# Altium PCB ELEC-URB-CANACC-R2.0A2.PcbDoc
Units mil, origin at the board's own origin, x right, y up, seen from the top; angles counter-clockwise.
Board outline 3310 x 3308 mil, 2 copper layers (Top Layer, Bottom Layer); 19 components, 18 nets, 120 pads, 18 vias.
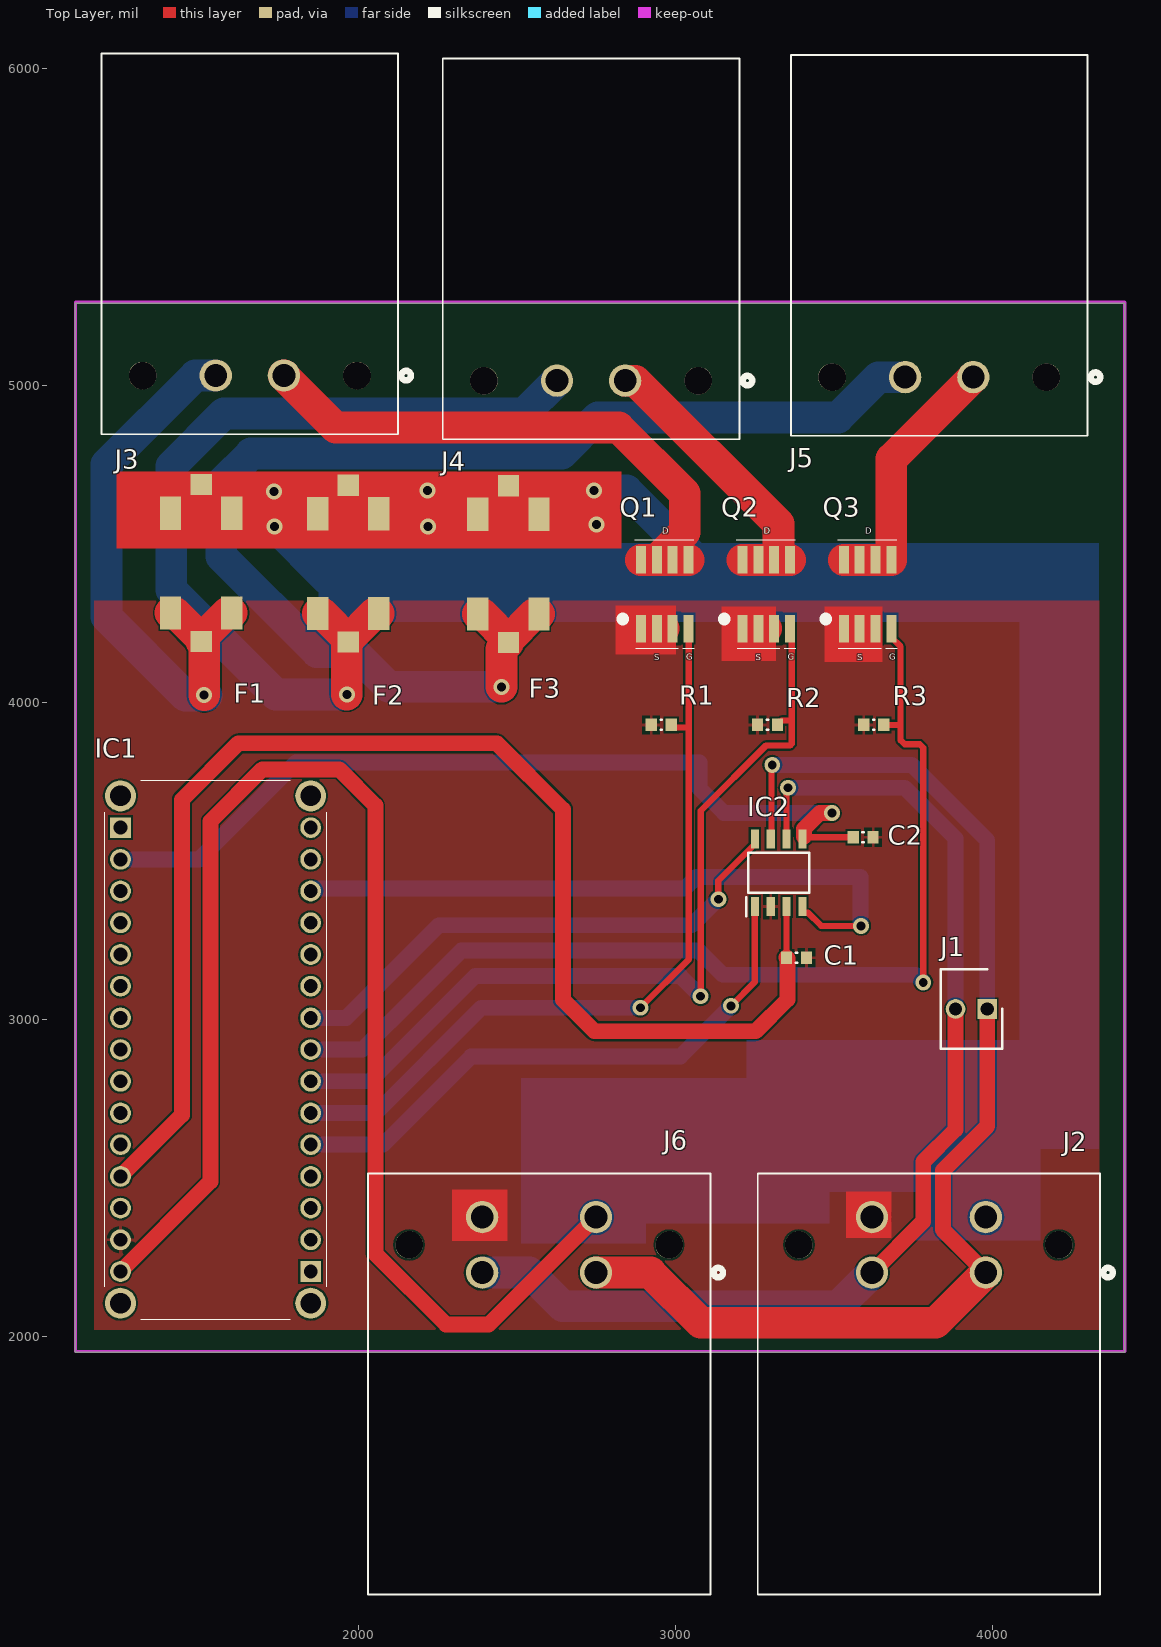
[diagram p0: Top Layer view]
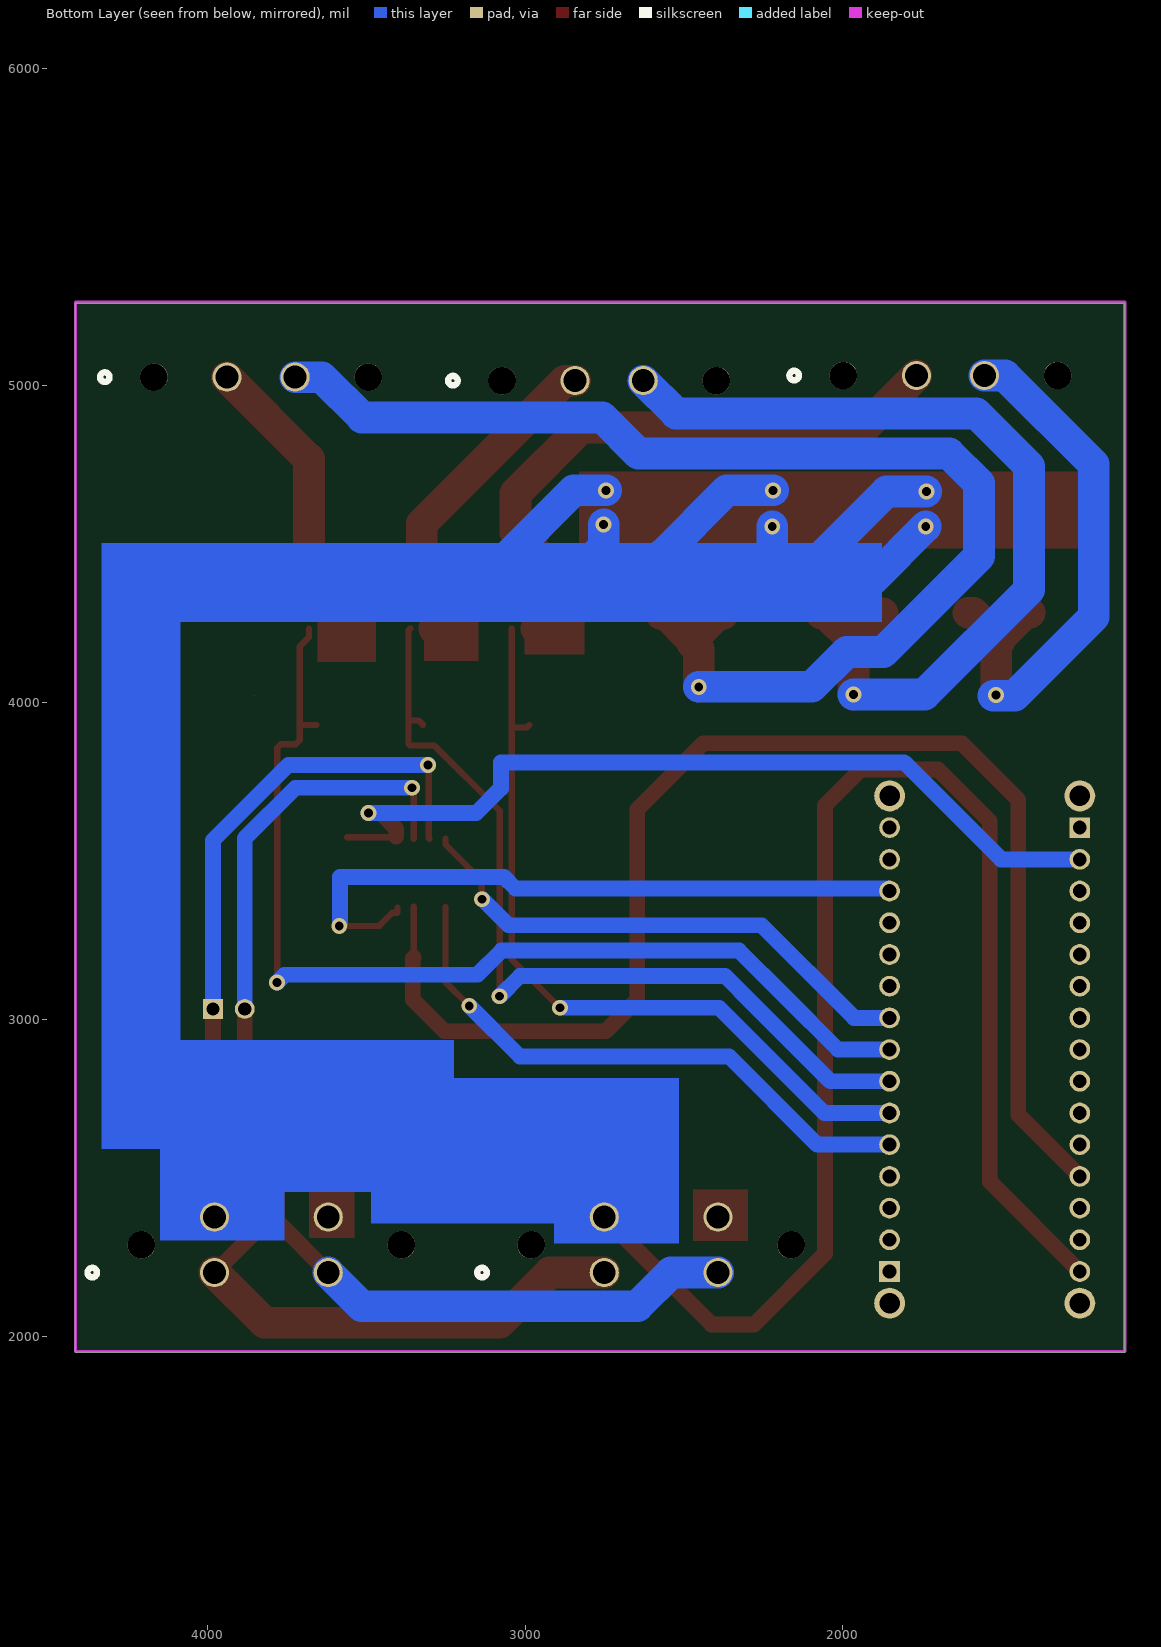
[diagram p1: Bottom Layer view, seen from below]

## Layer stack, top to bottom
Top Solder: solder mask 0.4, Solder Resist, Dk 3.5
Top Layer: signal copper 1.4
Dielectric 1: dielectric 12.6, FR-4, Dk 4.8
Bottom Layer: signal copper 1.4
Bottom Solder: solder mask 0.4, Solder Resist, Dk 3.5

## Board outline
1108,1950 4418,1950 4418,5258 1108,5258

## Design rules (kind name [scope] priority, off if disabled: settings)
BoardOutlineClearance [All] p1: gap=10 ignorepadtopadclearanceinfootprint=FALSE
Clearance [All] p1: gap=6 ignorepadtopadclearanceinfootprint=TRUE
HoleSize [All] p1: absolutevalues=TRUE maxlimit=250 minlimit=8 maxpercent=80.000 minpercent=20.000
MinimumAnnularRing [All] p1: minimumring=10
PlaneClearance [All] p1: clearance=15
PolygonConnect [All] p1: connectstyle=Relief reliefconductorwidth=10 reliefentries=4 polygonreliefangle="90 Angle" airgapwidth=10
RoutingVias [All] p1: holewidth=12 width=26 viastyle="Through Hole" minholewidth=8 minwidth=18 maxholewidth=28 maxwidth=50
SilkToSilkClearance [All] p1: silktosilkclearance=3
SilkToSolderMaskClearance [IsPad] p1: minsilkscreentomaskgap=3 clearancetoexposedcopper=TRUE
SolderMaskExpansion "Tented Via 2" [IsVia] p1: expansion=-200
SolderMaskExpansion "Tented Via" [IsVia] p2: expansion=-250
SolderMaskExpansion [All] p3: expansion=2
UnRoutedNet [All] p1: checkbadconnections=TRUE
Width [All] p1: maxlimit=100 minlimit=6 preferedwidth=10 minimp=50.000000 maximp=50.000000 favimp=50.000000
25 further rules are at their usual default settings.

## Components (designator, comment, footprint, x,y, rotation, side; value= is the part's Value field where it differs from the comment)
C1 "0.1uF" 0603C 3382.5,3194 r0 top value=1uF
C2 "0.1uF" 0603C 3592.5,3574 r180 top value=1uF
F1 "Small Fuse" "SML FUSE HOLDER" 1408,4596 r270 top
F2 "Small Fuse" "SML FUSE HOLDER" 2064.91,4279.43 r90 top
F3 "Small Fuse" "SML FUSE HOLDER" 2570,4278 r90 top
IC1 "NUCLEO L432KC" ABX00028 1250,3604 r270 top
IC2 "MCP2562FD-E_SN" SOIC127P600X175-8N 3326,3462 r90 top
J1 "0050291746" SHDR2W87P0X254_1X2_493X635X1044P 3984,3032 r180 top
J2 "DTF13-4P-G003" CONN4_DTF13-4P 3620.5,2375.49 r180 top value=Value
J3 "DTF13-2P" CONN2_DTF13-2P 1550.5,5030 r0 top value=Value
J4 "DTF13-2P" CONN2_DTF13-2P 2627,5014 r0 top value=Value
J5 "DTF13-2P" CONN2_DTF13-2P 3725,5025 r0 top value=Value
J6 "DTF13-4P-G003" CONN4_DTF13-4P 2391,2375.49 r180 top value=Value
Q1 "MOSFET-N" "DIODE MOSFET" 2892,4222.55 r0 top
Q2 "MOSFET-N" "DIODE MOSFET" 3211.77,4222.55 r0 top
Q3 "MOSFET-N" "DIODE MOSFET" 3531.54,4222.55 r0 top
R1 "10k" 0603R 2955.5,3928 r0 top
R2 "10k" 0603R 3290.75,3928 r0 top
R3 "10k" 0603R 3626,3928 r0 top

## Footprints (in the part's own frame and the unit in brackets; to place one, negate y for a bottom-side part, rotate by r counter-clockwise, add the part's x,y. Pads: shape width x height; smd on the part's side, far side on the other; paste and mask are expansions set on the pad)
0603C [mm] "Chip Capacitor, Body 1.6x0.8mm, Height 1.0mm, IPC Medium Density"
  rect 0.9x1 smd: 1(-0.8,0) 2(0.8,0)
  silkscreen extent -0.05,-0.4 0.05,0.4, body extent -0.87,-0.48 0.88,0.47, height 1
0603R [mm] "Chip Resistor, Body 1.6x0.8mm, IPC Medium Density"
  rect 0.9x1 smd: 1(-0.8,0) 2(0.8,0)
  silkscreen extent -0.05,-0.4 0.05,0.4, body extent -0.85,-0.47 0.85,0.47, height 0.6
ABX00028 [mm]
  rect 1.665x1.665 hole 1.11: A1(0,0) B1(35.56,15.24)
  round 1.665 hole 1.11: A2(2.54,0) A3(5.08,0) A4(7.62,0) A5(10.16,0) A6(12.7,0) A7(15.24,0) A8(17.78,0) A9(20.32,0) A10(22.86,0) A11(25.4,0) A12(27.94,0) A13(30.48,0) A14(33.02,0) A15(35.56,0) B2(33.02,15.24) B3(30.48,15.24) B4(27.94,15.24) B5(25.4,15.24) B6(22.86,15.24) B7(20.32,15.24) B8(17.78,15.24) B9(15.24,15.24) B10(12.7,15.24) B11(10.16,15.24) B12(7.62,15.24) B13(5.08,15.24) B14(2.54,15.24) B15(0,15.24)
  round 2.475 hole 1.65: MH1(-2.54,0) MH2(-2.54,15.24) MH3(38.1,15.24) MH4(38.1,0)
  silkscreen extent -3.81,-1.27 39.37,16.51, body extent -3.81,-1.27 39.37,16.51, height 10
CONN2_DTF13-2P [mil]
  round 102 / inner round 92 / far side round 92 hole 72 mask+0: 1(215,0) 2(0,0)
  round 87 hole 87: 3(-230.5,0) 4(445.5,0)
  silkscreen extent -360,-185 616,1016, body extent 0,0 10,10, height 10
CONN4_DTF13-4P [mil]
  round 102 / inner round 92 / far side round 92 hole 72 mask+0: 1(-359,175) 2(0,175) 3(-359,0) 4(0,0)
  round 87 hole 87: 5(-589.5,87.5) 6(230.5,87.5)
  silkscreen extent -760,-138 360,1190, body extent 0,0 10,10, height 10
"DIODE MOSFET" [mm]
  rect 0.8x2.2 smd: 1(0,5.74) 1(1.27,5.74) 1(2.54,5.74) 1(3.81,5.74) 2(3.81,0.24) 3(0,0.24) 3(1.27,0.24) 3(2.54,0.24)
  silkscreen extent -1.45,-1.32 4.27,7.35
SHDR2W87P0X254_1X2_493X635X1044P [mm]
  rect 1.575x1.575 hole 1.05: 1(0,0)
  round 1.575 hole 1.05: 2(2.54,0)
  silkscreen extent -1.19,-3.17 3.73,3.18
"SML FUSE HOLDER" [mm] "2 X 3586KTR"
  rect 1.7x1.7 smd: 1(-2.29,2.45) 2(10.28,2.45)
  rect 2.66x1.7 smd: 1(0,4.9) 1(0,0) 2(7.99,4.9) 2(7.99,0)
SOIC127P600X175-8N [mm]
  rect 1.525x0.65 smd: 1(-2.712,1.905) 2(-2.712,0.635) 3(-2.712,-0.635) 4(-2.712,-1.905) 5(2.712,-1.905) 6(2.712,-0.635) 7(2.712,0.635) 8(2.712,1.905)
  silkscreen extent -3.47,-2.45 1.6,2.58, body extent -3,-2.45 3,2.45, height 1.75

## Part data
C1 C2: library part "Cap 0.1uF", "Capacitor 0.1uF 16V", Revision="July-2002: Re-released for DXP Platform."
F1 F2 F3: library part "Fuse 1", "Fuse", LatestRevisionDate=17-Jul-2002, LatestRevisionNote="Re-released for DXP Platform.", PackageDescription="Thru-Hole; 2 Leads", PackageReference=PIN-W2/E2.8, Published=8-Jun-2000, Publisher="Altium Limited"
IC1: library part "NUCLEO L432KC Arduino Nano Pinout", "Integrated Circuit", Manufacturer_Name=Arduino, Manufacturer_Part_Number=ABX00028, Mouser Part Number=782-ABX00028, Datasheet Link=https://store.arduino.cc/arduino-nano-every, Height=10mm, Mouser Price/Stock=https://www.mouser.com/Search/Refine.aspx?Keyword=782-ABX00028
IC2: "Integrated Circuit", Manufacturer_Name=Microchip, Manufacturer_Part_Number=MCP2562FD-E/SN, Mouser Part Number=579-MCP2562FD-E/SN, RS Part Number=8243123P, Allied_Number=70431558, Allied Price/Stock=https://www.alliedelec.com/microchip-technology-inc-mcp2562fd-e-sn/70431558/, Datasheet Link=http://uk.rs-online.com/web/p/products/8243123, Height=1.75mm, Mouser Price/Stock=https://www.mouser.com/Search/Refine.aspx?Keyword=579-MCP2562FD-E%2FSN, RS Price/Stock=http://uk.rs-online.com/web/p/products/8243123P
J1: "Connector", Manufacturer_Name=Molex, Datasheet Link=http://www.molex.com/pdm_docs/sd/050291746_sd.pdf, Height=10.44mm, Manufacturer_Part_Number=0050291746
J2 J3 J4 J5 J6: "DTF RECP ASM", Built_By=EMA_Justin, Copyright="Copyright (C) 2016 Accelerated Designs. All rights reserved", PRODUCT=-, RefDes=RefDes, Type=DEV, Vendor="TE Connectivity"
  J2 J6: Datasheet=https://www.te.com/commerce/DocumentDelivery/DDEController?Action=showdoc&DocId=Customer+Drawing%7FDTF13-4P-G003%7FA%7Fpdf%7FEnglish%7FENG_CD_DTF13-4P-G003_A.pdf%7FDTF13-4P-G003, Manufacturer_Part_Number=DTF13-4P-G003, PITCH(MM)=0.175, POSITIONS=4, ROWS/CONFIG=2, TE_Part_Number=DTF13-4P-G003
  J3 J4 J5: Datasheet=https://www.te.com/commerce/DocumentDelivery/DDEController?Action=srchrtrv&DocNm=DTF13-2P&DocType=Customer+Drawing&DocLang=English&DocFormat=pdf&PartCntxt=DTF13-2P, Manufacturer_Part_Number=DTF13-2P, PITCH(MM)=0.215, POSITIONS=2, ROWS/CONFIG=1, TE_Part_Number=DTF13-2P
Q1 Q2 Q3: "N-Channel MOSFET", LatestRevisionDate=17-Jul-2002, LatestRevisionNote="Re-released for DXP Platform.", PackageDescription="TO, Flat Index; 3 In-Line, Axial Leads; Body Dia. 4.6mm; Lead Dia. 0.5 mm (max)", PackageReference=E3, PackageVersion=1995/1996, Published=8-Jun-2000, Publisher="Altium Limited"
R1 R2 R3: library part "Res 10k", "Resistor 10K", ComponentLink1Description=https://datasheet.ciiva.com/16511/aoa0000ce2-16511861.pdf?src-supplier=Avnet+Asia, ComponentLink1URL=https://datasheet.ciiva.com/16511/aoa0000ce2-16511861.pdf?src-supplier=Avnet+Asia, ComponentLink2Description=https://datasheet.ciiva.com/46372/1678782-46372725.pdf?src-supplier=Element14, ComponentLink2URL=https://datasheet.ciiva.com/46372/1678782-46372725.pdf?src-supplier=Element14, ComponentLink3Description=https://datasheet.ciiva.com/28514/426256-28514198.pdf?src-supplier=Element14, ComponentLink3URL=https://datasheet.ciiva.com/28514/426256-28514198.pdf?src-supplier=Element14, ComponentLink4Description=https://datasheet.ciiva.com/9194/aoa0000ce2-9194199.pdf?src-supplier=Avnet, ComponentLink4URL=https://datasheet.ciiva.com/9194/aoa0000ce2-9194199.pdf?src-supplier=Avnet, ComponentLink5Description=https://datasheet.ciiva.com/7830/aoa0000ce2-7830729.pdf?src-supplier=Element14, ComponentLink5URL=https://datasheet.ciiva.com/7830/aoa0000ce2-7830729.pdf?src-supplier=Element14, ComponentLink6Description=https://datasheet.ciiva.com/17212/aoa0000ce2-17212105.pdf?src-supplier=Avnet+Europe, ComponentLink6URL=https://datasheet.ciiva.com/17212/aoa0000ce2-17212105.pdf?src-supplier=Avnet+Europe, ComponentLink7Description=https://datasheet.ciiva.com/30208/aoa0000ce2-30208985.pdf?src-supplier=Onlinecomponents.com, ComponentLink7URL=https://datasheet.ciiva.com/30208/aoa0000ce2-30208985.pdf?src-supplier=Onlinecomponents.com, ComponentLink8Description=https://datasheet.ciiva.com/48530/aoa0000ce2-48530988.pdf?src-supplier=Avnet, ComponentLink8URL=https://datasheet.ciiva.com/48530/aoa0000ce2-48530988.pdf?src-supplier=Avnet, ComponentLink9Description=https://datasheet.ciiva.com/24070/aoa0000ce2-24070318.pdf?src-supplier=Mouser, ComponentLink9URL=https://datasheet.ciiva.com/24070/aoa0000ce2-24070318.pdf?src-supplier=Mouser, ComponentLink10Description=https://datasheet.ciiva.com/16759/70260748-16759807.pdf?src-supplier=Allied+Electronics, ComponentLink10URL=https://datasheet.ciiva.com/16759/70260748-16759807.pdf?src-supplier=Allied+Electronics

## Via types
v1: diameter 50, hole 28, Top Layer to Bottom Layer, 18 vias

## Nets (pads, with @x,y where several pads share a name; then routed paths per layer and width w, separated by ;. In a path a pad name is that pad's centre, name@x,y a point inside that pad or via, vN(x,y) a via of type N, cw(c..) or ccw(c..) an arc to the next point about the centre after c; other vN are vias at no path point)
3V3: C2.2 IC1.A2 IC2.5 | length 2781.4
  Top Layer w20: IC2.5 3401,3571.2 3403.8,3574 C2.2
  Top Layer w50: IC2.5@3406.02,3576 3406.02,3600.02 3456,3650 v1(3494,3650)
  Bottom Layer w50: IC1.A2 1498.1,3504 1804.1,3810 2048,3810 3076,3810 3076,3728 3154,3650 v1(3494,3650)
5V: C1.1 IC1.A12 IC2.3 | length 4315.7
  Top Layer w20: C1.1 IC2.3
  Top Layer w50: IC1.A12 1444,2698 1444,3692 1622,3870 2437.36,3870 2646,3661.36 2646,3061.15 2745.15,2962 3254,2962 3354,3062 3354,3191.01 C1.1
12V: F1.1 F2.2 F3.2 IC1.A15 J2.3 J6.3 | length 6721.7
  Top Layer w50: IC1.A15 1534.16,2488.16 1534.16,3624.16 1697.72,3787.72 1940.28,3787.72 2054,3674 2054,2260 2277.29,2036.71 2411.22,2036.71 J6.3 J6.3@2740.88,2375.49
  Bottom Layer w100: v1(1734,4664) 1860,4664 2136,4388 ; v1(1736,4554) 1902,4388 ; v1(2218,4668) 2363.42,4668 2566,4465.42 2566,4388 ; v1(2220,4554) 2220,4478 2310,4388 ; v1(2744,4668) 2846,4668 3072,4442 3072,4388 ; v1(2752,4560) 2752,4490 2854,4388 ; 4098,2670 4098,2708 4102,2712
CANH: IC2.7 J1.1 J2.1 J6.1 | length 3850.3
  Top Layer w20: IC2.7 3303.5,3571.27 3303.5,3799.5 v1(3306,3802)
  Top Layer w50: J2.1 3844,2335.99 3844,2522 3984,2662 J1.1
  Top Layer w100: J6.1 2921.63,2200.49 3080.12,2042 3821.01,2042 J2.1
  Bottom Layer w50: v1(3306,3802) 3746,3802 3984,3564 J1.1
CANL: IC2.6 J1.2 J2.2 J6.2 | length 3553.5
  Top Layer w20: IC2.6 3351,3725 v1(3356,3730)
  Top Layer w50: J2.2 3782,2361.99 3782,2550 3884,2652 J1.2
  Bottom Layer w50: v1(3356,3730) 3724,3730 3884,3570 J1.2
  Bottom Layer w100: J6.2 2539.45,2200.49 2645.45,2094.49 3514.5,2094.49 J2.2
CANRX: IC1.B13 IC2.4 | length 2115
  Top Layer w20: IC2.4@3402,3352 3402,3337 3403.8,3335.21 3418.79,3335.21 3460,3294 v1(3586,3294)
  Bottom Layer w50: IC1.B13 1858,3412 3030,3412 3066,3448 3584,3448 v1@3584,3302
CANTX: IC1.B5 IC2.1 | length 1849.5
  Top Layer w20: v1(3176,3042) 3251,3117 IC2.1@3251,3353
  Bottom Layer w50: IC1.B5 2078,2604 2356,2882 3016,2882 v1(3176,3042)
GATE1: IC1.B6 Q1.2 R1.2 | length 2495
  Top Layer w20: v1(2890,3036) 3042,3188 3042,3920 ; R1.2 2986.99,3927.72 2994.71,3920 3042,3920 ; Q1.2 3042,3920
  Bottom Layer w50: IC1.B6 2056,2704 2388,3036 v1(2890,3036)
GATE2: IC1.B7 Q2.2 R2.2 | length 2772.2
  Top Layer w20: v1(3080,3072) 3080,3657.02 3286.05,3863.07 3362.01,3863.07 3367.52,3868.58 3367.52,3942 ; R2.2 3322.24,3929.97 3329.96,3937.69 3331.93,3937.69 3336.24,3942 3367.52,3942 ; Q2.2 3367.52,4226.25 3367.52,3942
  Bottom Layer w50: IC1.B7 2036.85,2804 2280,3047.15 2368.85,3136 3016,3136 v1(3080,3072)
GATE3: IC1.B8 Q3.2 R3.2 | length 3342.9
  Top Layer w20: R3.2 3706.65,3928 3710.65,3924 ; Q3.2 3681.54,4204.44 3710.65,4175.34 3710.65,3924 ; v1(3782,3116) 3782,3855.89 3770.82,3867.07 3723.28,3867.07 3710.65,3879.71 3710.65,3924
  Bottom Layer w50: IC1.B8 2012.85,2904 2180.85,3072 2324.85,3216 3074,3216 3150.19,3139.81 3758.19,3139.81 v1(3782,3116)
GND: C1.2 C2.1 IC1.A14 IC2.2 J2.4 J6.4 Q1.3 Q2.3 Q3.3 R1.1 R2.1 R3.1 | length 218.7
  Top Layer w100: Q1.3@2888,4232 2892,4232 2942,4232 2964,4232 ; Q2.3@3211.77,4232 3261.77,4232 3286.02,4232 ; Q3.3@3535.54,4236 3604,4236
NetF1_2: F1.2 J3.2 | length 1802.9
  Top Layer w100: F1.2@1408,4281.43 1422.17,4281.43 F1.2@1504.46,4199.15 ; v1(1514,4022) 1514,4181.73 1504.46,4191.28 F1.2@1504.46,4199.15 ; F1.2@1600.91,4281.43 1586.74,4281.43 F1.2@1504.46,4199.15
  Bottom Layer w100: v1@1522,4020 1454.82,4020 1206,4268.82 1206,4750 1486,5030 J3.2
NetF2_1: F2.1 J4.2 | length 2845.6
  Top Layer w100: F2.1@1872,4279.43 1886.17,4279.43 F2.1@1968.46,4197.15 ; v1(1964,4024) 1964,4184.82 1968.46,4189.28 F2.1@1968.46,4197.15 ; F2.1@2064.91,4279.43 2050.74,4279.43 F2.1@1968.46,4197.15
  Bottom Layer w100: v1(1964,4024) 1740,4024 1410,4354 1410,4744 1576.5,4910.5 2523.5,4910.5 J4.2
NetF3_1: F3.1 J5.2 | length 3998.1
  Top Layer w100: F3.1@2377.09,4278 2391.26,4278 F3.1@2473.54,4195.72 ; v1(2452,4048) 2452,4166.3 2473.54,4187.84 F3.1@2473.54,4195.72 ; F3.1@2570,4278 2555.83,4278 F3.1@2473.54,4195.72
  Bottom Layer w100: v1(2452,4048) 2095.56,4048 1985.56,4158 1870,4158 1568,4460 1568,4690 1662,4784 2642,4784 2756,4898 3513.87,4898 3640.87,5025 J5.2
NetJ3_1: J3.1 Q1.1 | length 1814.5
  Top Layer w100: J3.1 1929.5,4866 2822,4866 3030,4658 3030,4536.54 Q1.1@2942,4448.54 ; Q1.1@2892,4448.54 Q1.1@2942,4448.54 ; Q1.1@3042,4448.54 2992,4448.54 Q1.1@2942,4448.54
NetJ4_1: J4.1 Q2.1 | length 940.3
  Top Layer w100: J4.1 2874,5014 3325.62,4562.38 3325.62,4462.38 Q2.1@3311.77,4448.54 ; Q2.1@3211.77,4448.54 3261.77,4448.54 Q2.1@3311.77,4448.54 ; Q2.1@3361.77,4448.54 Q2.1@3311.77,4448.54
NetJ5_1: J5.1 Q3.1 | length 833.5
  Top Layer w100: Q3.1@3531.54,4448.54 3581.54,4448.54 3631.54,4448.54 3681.54,4448.54 3681.54,4766.54 J5.1
STBY: IC1.B9 IC2.8 | length 1678.7
  Top Layer w20: v1(3136,3378) 3136,3436.55 3251,3551.55 IC2.8
  Bottom Layer w50: IC1.B9 1962,3004 2254,3296 3052,3296 v1@3135,3379
pads on no net: IC1.A1 IC1.A3 IC1.A4 IC1.A5 IC1.A6 IC1.A7 IC1.A8 IC1.A9 IC1.A10 IC1.A11 IC1.A13 IC1.B1 IC1.B2 IC1.B3 IC1.B4 IC1.B10 IC1.B11 IC1.B12 IC1.B14 IC1.B15 IC1.MH1 IC1.MH2 IC1.MH3 IC1.MH4 J2.5 J2.6 J3.3 J3.4 J4.3 J4.4 J5.3 J5.4 J6.5 J6.6

## Polygon pours and split planes (outlines as drawn)
no net on Bottom Layer "Bottom Layer-No Net" (solid, pour order 0): 2832,4360
GND on Top Layer "Top Layer-GND" (solid, pour order 8): 1168,4320 4338,4320 4338,2020 1168,2020
no net on Top Layer "Top Layer-No Net" (solid, pour order 4): 3040,4024
no net on Mechanical 13 (solid): 1206,4338
no net on Mechanical 13 (solid): 1162,4422

## Keep-outs
Bottom Layer:
  region: 3852,4022
Keep-Out Layer:
  lines w10: 1108,1952 1108,5262 4418,5262 4418,1952 1108,1952

## Other copper
Top Layer:
  rectangle net GND: 3470,4126 3654,4302
  rectangle net GND: 3146,4130 3318,4302
  rectangle net GND: 2812,4150 3002,4304
  rectangle net GND: 3538,2310 3681.3,2456
  rectangle net GND: 2296,2300 2470,2462
  rectangle net 12V: 1238,4484 2830,4728
Bottom Layer:
  rectangle net 12V: 1874,4252 4336,4502
  rectangle net 12V: 4086,2590 4336,4452
  rectangle net 12V: 3224,2566 4152,2934
  rectangle net 12V: 2514,2292 2908,2814
  rectangle net 12V: 3758,2302 4152,2602
  rectangle net 12V: 3324,2454 4152,2762
  rectangle net 12V: 2706,2356 3486,2814

## Text inside footprints (layer, text, board x,y; h text height)
J2: Mechanical 7 "1.318in/33.477mm" at 4955,1751.49 h25 r180; Mechanical 7 "1.098in/27.889mm" at 4855,1751.49 h25 r180; Mechanical 7 "0in/0mm" at 4542.5,2300.49 h25 r180; Mechanical 7 "0.175in/4.445mm" at 3145,2300.49 h25 r180; Mechanical 7 "1.07in/27.178mm" at 3893.75,769.99 h25 r180; Mechanical 7 "0.82in/20.828mm" at 3893.75,869.99 h25 r180; Mechanical 7 "0.359in/9.119mm" at 4163,1069.99 h25 r180; Mechanical 7 "Alt Padstyle 2: OX90Y60D30P" at 4137.5,3182.99 h50 r180; Mechanical 7 "Alt Padstyle 1: OX60Y90D30P" at 4137.5,3107.99 h50 r180; Mechanical 7 "Right Mtg Padstyle: EX60Y60D30P" at 4187.5,3032.99 h50 r180; Mechanical 7 "Left Mtg Padstyle: EX60Y60D30P" at 4175,2957.99 h50 r180; Mechanical 7 "3rd Mtg Padstyle: EX70Y70D70P" at 4162.5,2882.99 h50 r180; Mechanical 7 "2nd Mtg Padstyle: EX70Y70D70P" at 4162.5,2807.99 h50 r180; Mechanical 7 "1st Mtg Padstyle: EX87Y87D87P" at 4162.5,2732.99 h50 r180; Mechanical 7 "Default Padstyle: EX92Y92D72P" at 4162.5,2657.99 h50 r180
J3: Mechanical 7 "1.191in/30.251mm" at 575,5523 h25; Mechanical 7 "1.011in/25.679mm" at 675,5523 h25; Mechanical 7 "0in/0mm" at 987.5,5017.5 h25; Mechanical 7 "0in/0mm" at 2241,5017.5 h25; Mechanical 7 "0.926in/23.52mm" at 1564.25,6461 h25; Mechanical 7 "0.676in/17.17mm" at 1564.25,6361 h25; Mechanical 7 "0.215in/5.461mm" at 1725.5,6161 h25; Mechanical 7 "Alt Padstyle 2: OX90Y60D30P" at 1320.5,4175 h50; Mechanical 7 "Alt Padstyle 1: OX60Y90D30P" at 1320.5,4250 h50; Mechanical 7 "Right Mtg Padstyle: EX60Y60D30P" at 1270.5,4325 h50; Mechanical 7 "Left Mtg Padstyle: EX60Y60D30P" at 1283,4400 h50; Mechanical 7 "3rd Mtg Padstyle: EX70Y70D70P" at 1295.5,4475 h50; Mechanical 7 "2nd Mtg Padstyle: EX70Y70D70P" at 1295.5,4550 h50; Mechanical 7 "1st Mtg Padstyle: EX87Y87D87P" at 1295.5,4625 h50; Mechanical 7 "Default Padstyle: EX92Y92D72P" at 1295.5,4700 h50
J4: Mechanical 7 "1.191in/30.251mm" at 1651.5,5507 h25; Mechanical 7 "1.011in/25.679mm" at 1751.5,5507 h25; Mechanical 7 "0in/0mm" at 2064,5001.5 h25; Mechanical 7 "0in/0mm" at 3317.5,5001.5 h25; Mechanical 7 "0.926in/23.52mm" at 2640.75,6445 h25; Mechanical 7 "0.676in/17.17mm" at 2640.75,6345 h25; Mechanical 7 "0.215in/5.461mm" at 2802,6145 h25; Mechanical 7 "Alt Padstyle 2: OX90Y60D30P" at 2397,4159 h50; Mechanical 7 "Alt Padstyle 1: OX60Y90D30P" at 2397,4234 h50; Mechanical 7 "Right Mtg Padstyle: EX60Y60D30P" at 2347,4309 h50; Mechanical 7 "Left Mtg Padstyle: EX60Y60D30P" at 2359.5,4384 h50; Mechanical 7 "3rd Mtg Padstyle: EX70Y70D70P" at 2372,4459 h50; Mechanical 7 "2nd Mtg Padstyle: EX70Y70D70P" at 2372,4534 h50; Mechanical 7 "1st Mtg Padstyle: EX87Y87D87P" at 2372,4609 h50; Mechanical 7 "Default Padstyle: EX92Y92D72P" at 2372,4684 h50
J5: Mechanical 7 "1.191in/30.251mm" at 2749.5,5518 h25; Mechanical 7 "1.011in/25.679mm" at 2849.5,5518 h25; Mechanical 7 "0in/0mm" at 3162,5012.5 h25; Mechanical 7 "0in/0mm" at 4415.5,5012.5 h25; Mechanical 7 "0.926in/23.52mm" at 3738.75,6456 h25; Mechanical 7 "0.676in/17.17mm" at 3738.75,6356 h25; Mechanical 7 "0.215in/5.461mm" at 3900,6156 h25; Mechanical 7 "Alt Padstyle 2: OX90Y60D30P" at 3495,4170 h50; Mechanical 7 "Alt Padstyle 1: OX60Y90D30P" at 3495,4245 h50; Mechanical 7 "Right Mtg Padstyle: EX60Y60D30P" at 3445,4320 h50; Mechanical 7 "Left Mtg Padstyle: EX60Y60D30P" at 3457.5,4395 h50; Mechanical 7 "3rd Mtg Padstyle: EX70Y70D70P" at 3470,4470 h50; Mechanical 7 "2nd Mtg Padstyle: EX70Y70D70P" at 3470,4545 h50; Mechanical 7 "1st Mtg Padstyle: EX87Y87D87P" at 3470,4620 h50; Mechanical 7 "Default Padstyle: EX92Y92D72P" at 3470,4695 h50
J6: Mechanical 7 "1.318in/33.477mm" at 3725.5,1751.49 h25 r180; Mechanical 7 "1.098in/27.889mm" at 3625.5,1751.49 h25 r180; Mechanical 7 "0in/0mm" at 3313,2300.49 h25 r180; Mechanical 7 "0.175in/4.445mm" at 1915.5,2300.49 h25 r180; Mechanical 7 "1.07in/27.178mm" at 2664.25,769.99 h25 r180; Mechanical 7 "0.82in/20.828mm" at 2664.25,869.99 h25 r180; Mechanical 7 "0.359in/9.119mm" at 2933.5,1069.99 h25 r180; Mechanical 7 "Alt Padstyle 2: OX90Y60D30P" at 2908,3182.99 h50 r180; Mechanical 7 "Alt Padstyle 1: OX60Y90D30P" at 2908,3107.99 h50 r180; Mechanical 7 "Right Mtg Padstyle: EX60Y60D30P" at 2958,3032.99 h50 r180; Mechanical 7 "Left Mtg Padstyle: EX60Y60D30P" at 2945.5,2957.99 h50 r180; Mechanical 7 "3rd Mtg Padstyle: EX70Y70D70P" at 2933,2882.99 h50 r180; Mechanical 7 "2nd Mtg Padstyle: EX70Y70D70P" at 2933,2807.99 h50 r180; Mechanical 7 "1st Mtg Padstyle: EX87Y87D87P" at 2933,2732.99 h50 r180; Mechanical 7 "Default Padstyle: EX92Y92D72P" at 2933,2657.99 h50 r180
Q1: Top Overlay "D" at 2958.93,4530.62 h19.68; Top Overlay "G" at 3034.72,4133.97 h19.68; Top Overlay "S" at 2934.32,4132 h19.68
Q2: Top Overlay "D" at 3278.7,4530.62 h19.68; Top Overlay "G" at 3354.49,4133.97 h19.68; Top Overlay "S" at 3254.09,4132 h19.68
Q3: Top Overlay "D" at 3598.47,4530.62 h19.68; Top Overlay "G" at 3674.26,4133.97 h19.68; Top Overlay "S" at 3573.87,4132 h19.68